# EAGLE board eagle (EAGLE 9.0.0)
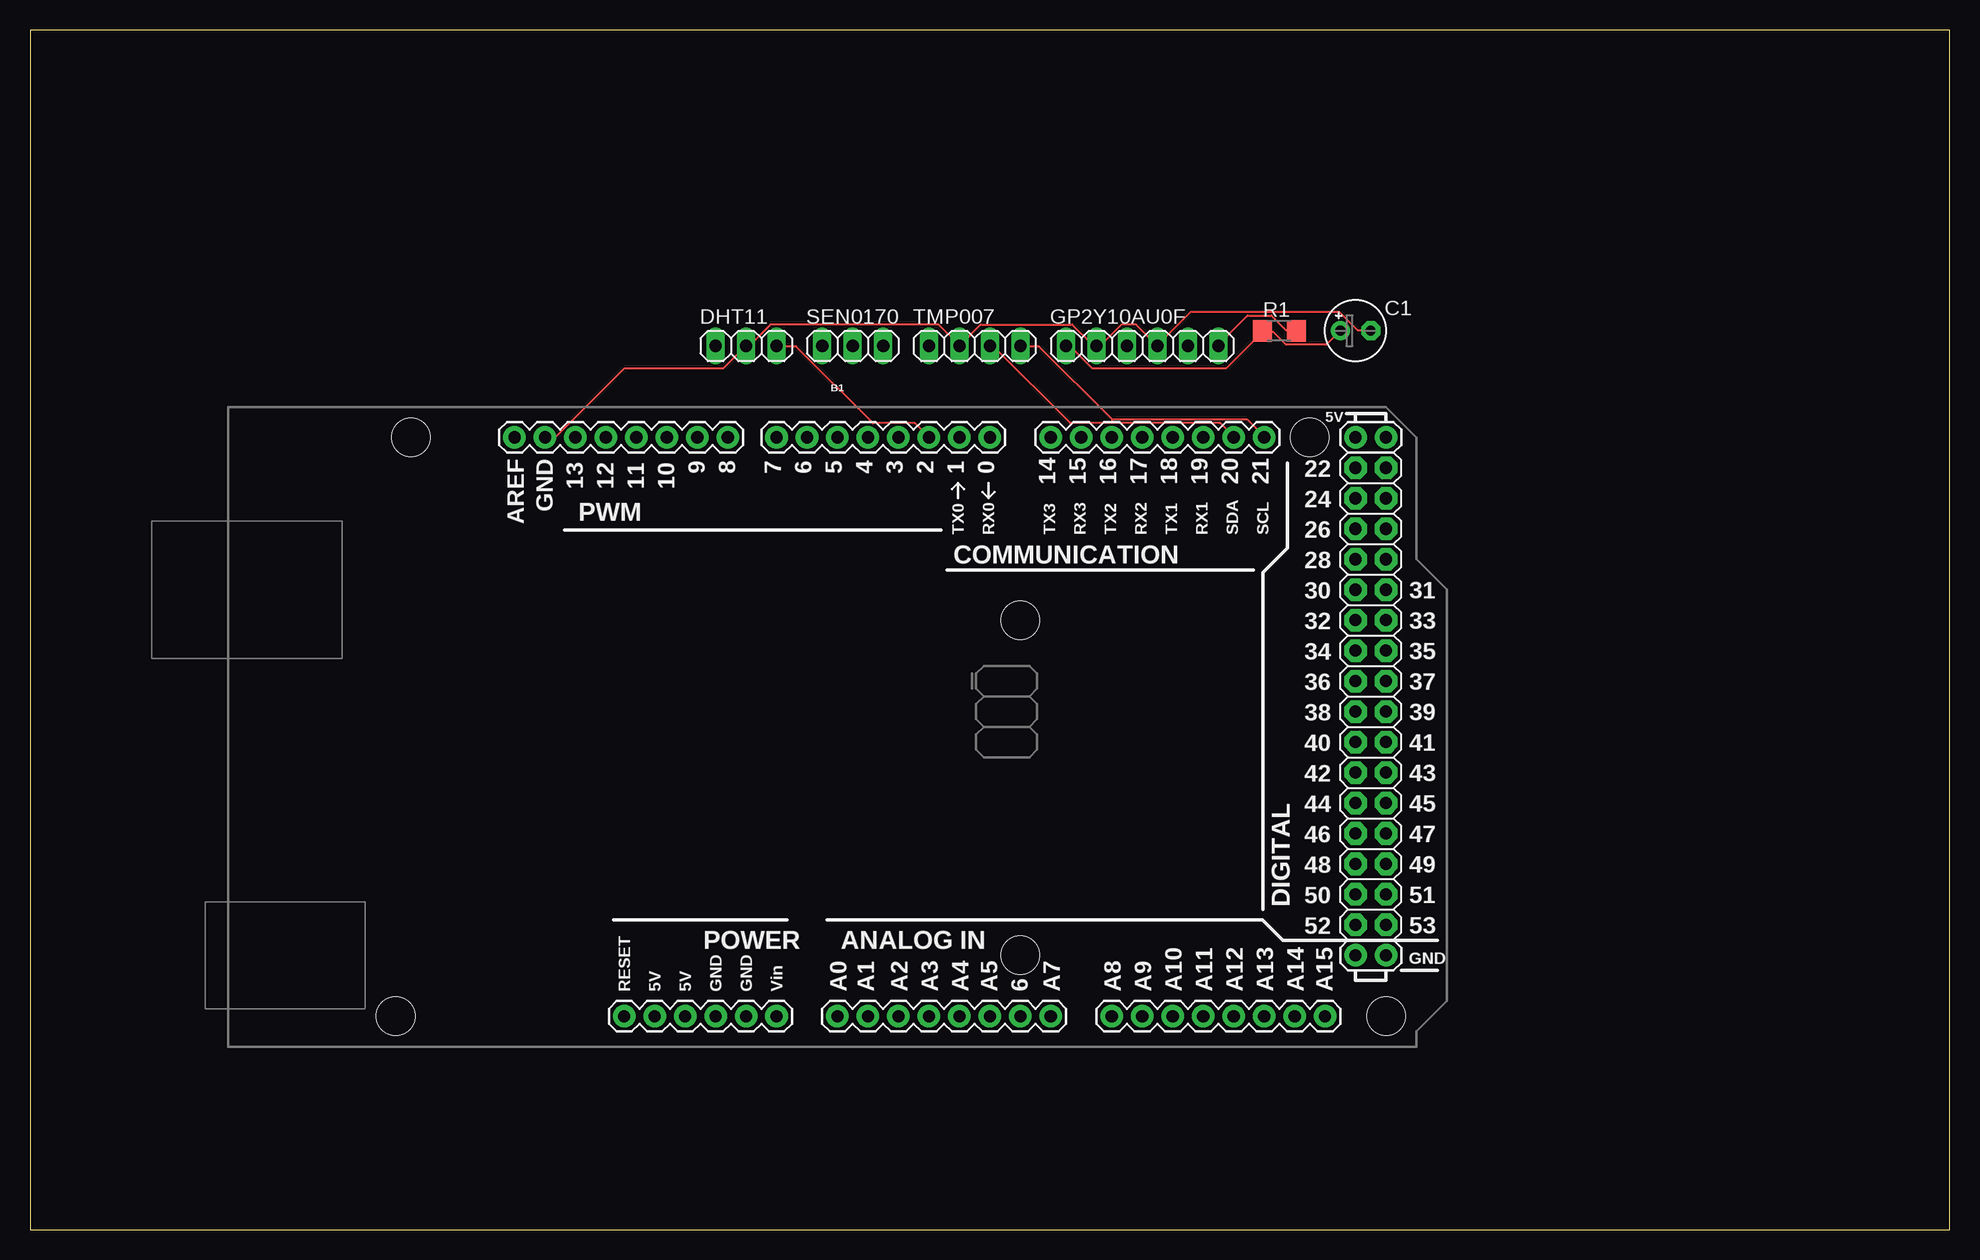
[diagram p0: board, top side]
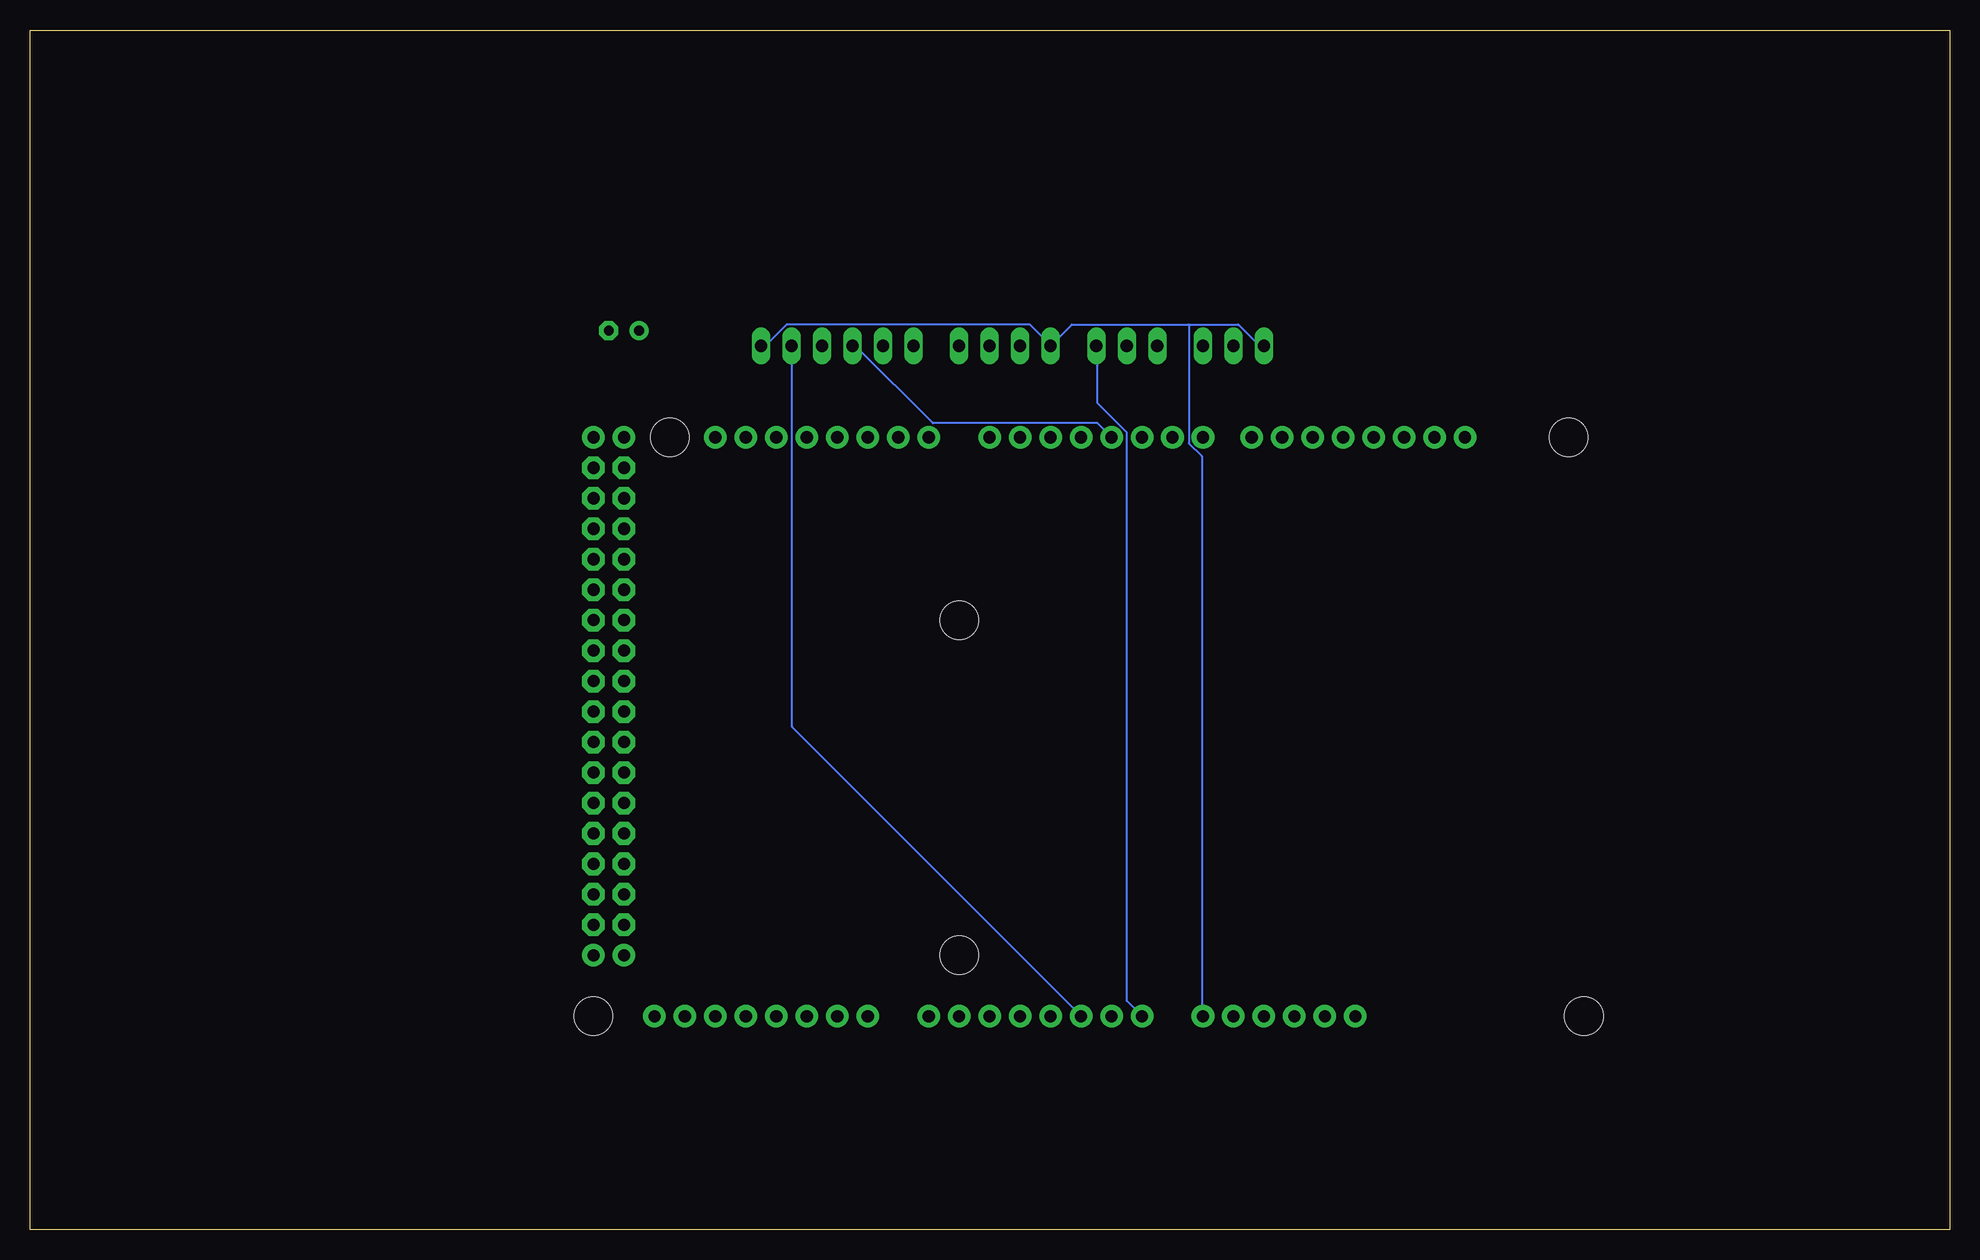
[diagram p1: board, bottom side, seen from below]

Size 160 x 100 mm. Coordinates in mm from the lower left corner, seen from the top.
Outline: 0,0 160,0 160,100 0,100 0,0
Copper layers (1*16): Top 0.035mm / dielectric 1.5mm / Bottom 0.035mm
Design rules "default": minimum track width 6mil, minimum drill 0.35mm, track to track 6mil, track to pad 6mil, pad to pad 6mil, via to via 6mil, smd to smd 6mil, copper to edge 40mil, drill to drill 6mil, minimum pad ring 10mil, minimum via ring 8mil, stop-mask expansion 4mil, vias tented up to drill 0mil, thermal gap 10mil

## Footprints (pad centres in the part's own frame; a part is rotated, then mirrored left to right if it is on the bottom)
ARDUINO_MEGA = drill 1.016 pad 1.88: 0 13.97,24.13; 1 11.43,24.13; 2 8.89,24.13; 3 6.35,24.13; 3.3V -13.97,-24.13; 4 3.81,24.13; 5 1.27,24.13; 5V@0 -11.43,-24.13; 5V@1 44.45,24.13; 5V@2 46.99,24.13; 6 -1.27,24.13; 7 -3.81,24.13; 8 -7.874,24.13; 9 -10.414,24.13; 10 -12.954,24.13; 11 -15.494,24.13; 12 -18.034,24.13; 13 -20.574,24.13; 14 19.05,24.13; 15 21.59,24.13; 16 24.13,24.13; 17 26.67,24.13; 18 29.21,24.13; 19 31.75,24.13; 20 34.29,24.13; 21 36.83,24.13; A0 1.27,-24.13; A1 3.81,-24.13; A2 6.35,-24.13; A3 8.89,-24.13; A4 11.43,-24.13; A5 13.97,-24.13; A6 16.51,-24.13; A7 19.05,-24.13; A8 24.13,-24.13; A9 26.67,-24.13; A10 29.21,-24.13; A11 31.75,-24.13; A12 34.29,-24.13; A13 36.83,-24.13; A14 39.37,-24.13; A15 41.91,-24.13; AREF -25.654,24.13; GND@0 -8.89,-24.13; GND@1 -6.35,-24.13; GND@2 44.45,-19.05; GND@3 46.99,-19.05; GND@4 -23.114,24.13; RESET -16.51,-24.13; VIN -3.81,-24.13 | drill 1.016 pad 1.88 octagon: 22 44.45,21.59; 23 46.99,21.59; 24 44.45,19.05; 25 46.99,19.05; 26 44.45,16.51; 27 46.99,16.51; 28 44.45,13.97; 29 46.99,13.97; 30 44.45,11.43; 31 46.99,11.43; 32 44.45,8.89; 33 46.99,8.89; 34 44.45,6.35; 35 46.99,6.35; 36 44.45,3.81; 37 46.99,3.81; 38 44.45,1.27; 39 46.99,1.27; 40 44.45,-1.27; 41 46.99,-1.27; 42 44.45,-3.81; 43 46.99,-3.81; 44 44.45,-6.35; 45 46.99,-6.35; 46 44.45,-8.89; 47 46.99,-8.89; 48 44.45,-11.43; 49 46.99,-11.43; 50 44.45,-13.97; 51 46.99,-13.97; 52 44.45,-16.51; 53 46.99,-16.51 | hole 3.2: -34.29,24.13; -35.56,-24.13; 16.51,8.89; 16.51,-19.05; 40.64,24.13; 46.99,-24.13
E2,5-5 = drill 0.813 pad 1.6: + -1.27,0 | drill 0.813 pad 1.6 octagon: - 1.27,0
1X03 = drill 1.016 long: 1 -2.54,0; 2 0,0; 3 2.54,0
1X06 = drill 1.016 long: 1 -6.35,0; 2 -3.81,0; 3 -1.27,0; 4 1.27,0; 5 3.81,0; 6 6.35,0
R1206 = smd 1.6 x 1.803: 1 -1.422,0; 2 1.422,0
1X04 = drill 1.016 long: 1 -3.81,0; 2 -1.27,0; 3 1.27,0; 4 3.81,0

## Placement (x,y rotation side)
B1  ARDUINO_MEGA_R3FULL  [ARDUINO_MEGA]  66.04,41.91 0 top
C1  220 uF  [E2,5-5]  110.49,74.93 0 top
DHT11  [1X03]  59.69,73.66 0 top
GP2Y10AU0F  [1X06]  92.71,73.66 0 top
R1  150Ω  [R1206]  104.14,74.93 0 top
SEN0170  [1X03]  68.58,73.66 0 top
TMP007  [1X04]  78.74,73.66 0 top

## Library data of the parts
B1 = SparkFun-Boards
C1 = rcl; SPICEPREFIX: C
DHT11 GP2Y10AU0F SEN0170 TMP007 = pinhead
R1 = audio amplifier example

## Nets
+12V(적색): SEN0170.1
DATA: B1.2 DHT11.3
GND: B1.GND@4 C1.- DHT11.2 GP2Y10AU0F.2 GP2Y10AU0F.4 TMP007.2
GND(흑색): SEN0170.2
LED: B1.4 GP2Y10AU0F.3
SCL: B1.21 TMP007.4
SDA: B1.20 TMP007.3
V-LED: C1.+ GP2Y10AU0F.1 R1.1
VCC: B1.VIN DHT11.1 GP2Y10AU0F.6 R1.2 TMP007.1
VO: B1.A2 GP2Y10AU0F.5
VOLT(황색): B1.A0 SEN0170.3

## Tracks (layer width: path | path; a pad name or v marks a point on that pad's centre or on a via)
DATA
  Top 0.152: B1.2 73.76,67.21 70.26,67.21 63.86,73.61 62.33,73.61 DHT11.3
GND
  Top 0.152: C1.- 111.71,74.98 110.64,74.98 109.12,76.5 96.77,76.5 94.03,73.76 GP2Y10AU0F.4 92.2,75.44 90.98,75.44 89.31,73.76 89,73.76 GP2Y10AU0F.2 88.85,73.76 88.54,73.76 86.87,75.44 79.25,75.44 TMP007.2 77.42,73.76 75.74,75.44 61.72,75.44 60.05,73.76 59.74,73.76 DHT11.2 59.59,73.61 57.76,71.78 49.53,71.78 43.89,66.14 42.98,66.14 B1.GND@4
LED
  Bottom 0.152: B1.4 71.02,67.21 84.73,67.21 91.14,73.61 91.44,73.61 GP2Y10AU0F.3
SCL
  Top 0.152: TMP007.4 82.6,73.61 84.12,73.61 90.22,67.51 101.5,67.51 102.87,66.14 B1.21
SDA
  Top 0.152: TMP007.3 80.01,73.61 80.31,73.61 86.72,67.21 99.21,67.21 100.28,66.14 B1.20
V-LED
  Top 0.152: C1.+ 108.05,73.76 104.7,73.76 103.63,74.83 102.87,74.83 R1.1 102.72,74.83 99.67,71.78 88.54,71.78 86.72,73.61 86.41,73.61 GP2Y10AU0F.1
VCC
  Top 0.152: R1.2 105.46,74.98 104.7,74.98 103.48,76.2 101.5,76.2 99.06,73.76 GP2Y10AU0F.6
  Bottom 0.152: 63.4,75.44 73.15,75.44 TMP007.1 74.98,73.76 76.66,75.44 96.93,75.44 98.6,73.76 99.06,73.76 GP2Y10AU0F.6 | 63.4,75.44 59.28,75.44 57.61,73.76 57.15,73.76 DHT11.1 | 63.4,75.44 63.4,65.53 62.33,64.47 62.33,17.83 B1.VIN
VO
  Bottom 0.152: GP2Y10AU0F.5 96.47,73.61 96.47,41.91 72.39,17.83 B1.A2
VOLT(황색)
  Bottom 0.152: B1.A0 68.58,19.05 68.58,66.45 71.02,68.89 71.02,73.61 SEN0170.3